# EAGLE board V4-AddOnZigbee-SMD-V006 (EAGLE 9.3.0)
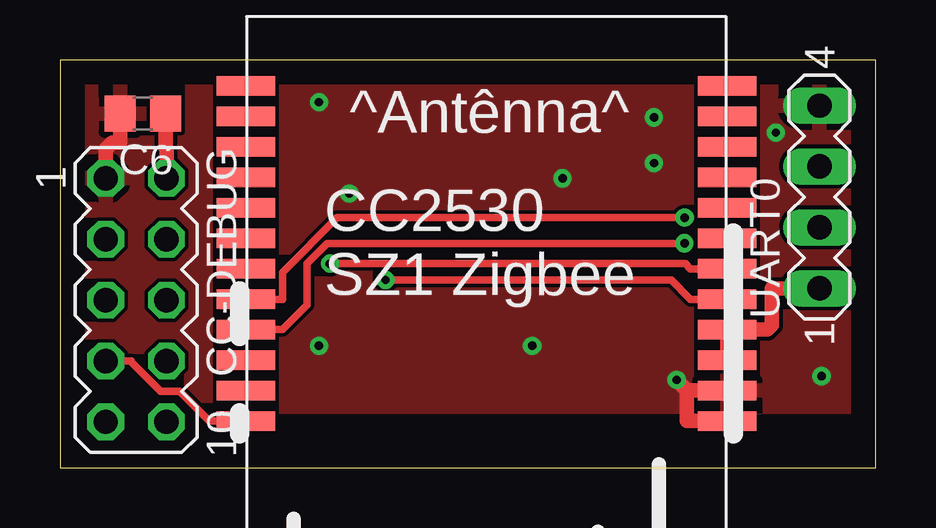
[diagram p0: board, top side]
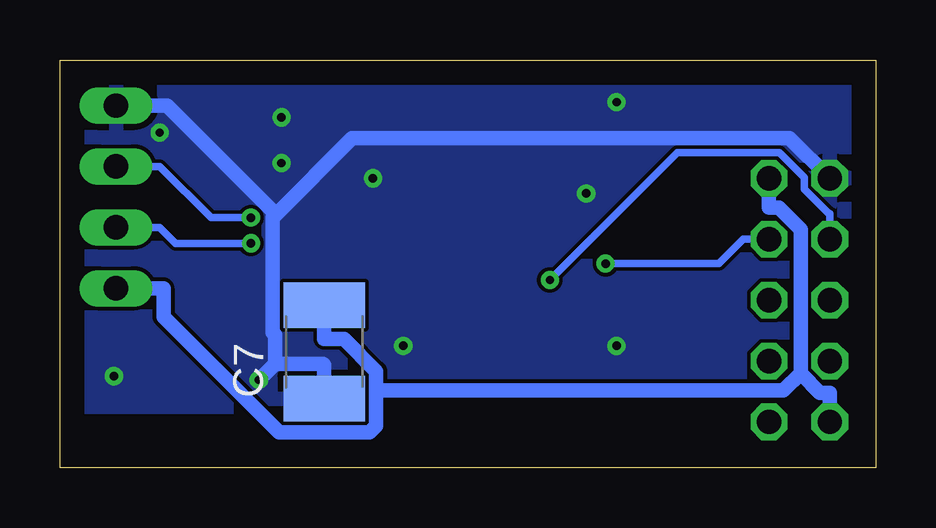
[diagram p1: board, bottom side, seen from below]

Size 34 x 17 mm. Coordinates in mm from the lower left corner, seen from the top.
Outline: 0,0 34,0 34,17 0,17 0,0
Copper layers (1*16): Top 0.035mm / dielectric 1.5mm / Bottom 0.035mm
Design rules "default": minimum track width 6mil, minimum drill 0.35mm, track to track 6mil, track to pad 6mil, pad to pad 6mil, via to via 6mil, smd to smd 6mil, copper to edge 40mil, drill to drill 6mil, minimum pad ring 10mil, minimum via ring 8mil, stop-mask expansion 4mil, vias tented up to drill 0mil, thermal gap 10mil
Net classes: 0 default: width 0.305 mm; 1 PWR: width 0.61 mm

## Footprints (pad centres in the part's own frame; a part is rotated, then mirrored left to right if it is on the bottom)
C0805 = smd 1.3 x 1.5: 1 -0.95,0; 2 0.95,0
C1812 = smd 1.9 x 3.4: 1 -1.95,0; 2 1.95,0
MA05-2 = drill 1.016 octagon: 1 -5.08,-1.27; 2 -5.08,1.27; 3 -2.54,-1.27; 4 -2.54,1.27; 5 0,-1.27; 6 0,1.27; 7 2.54,-1.27; 8 2.54,1.27; 9 5.08,-1.27; 10 5.08,1.27
SZ1ZIGBEE-SMD = smd 2.438 x 0.813: P$1 -10.036,-12.101; P$2 -10.036,-10.831; P$3 -10.036,-9.561; P$4 -10.036,-8.291; P$5 -10.036,-7.021; P$6 -10.036,-5.751; P$7 -10.036,-4.481; P$8 -10.036,-3.211; P$9 -10.036,-1.941; P$10 -10.036,-0.671; P$11 -10.036,0.599; P$12 -10.036,1.869; P$13 10.03,-12.101; P$14 10.03,-10.831; P$15 10.03,-9.561; P$16 10.03,-8.291; P$17 10.03,-7.021; P$18 10.03,-5.751; P$19 10.03,-4.481; P$20 10.03,-3.211; P$21 10.03,-1.941; P$22 10.03,-0.671; P$23 10.03,0.599; P$24 10.03,1.869
MA04-1 = drill 1.016 long: 1 -3.81,0; 2 -1.27,0; 3 1.27,0; 4 3.81,0

## Placement (x,y rotation side)
C6  22pF  [C0805]  3.46,14.76 180 top
C7  [C1812]  22.98,4.83 90 bottom
CC-DEBUG  [MA05-2]  3.17,6.99 270 top
U$1  CC2530  [SZ1ZIGBEE-SMD]  17.78,3.81 180 top
UART0  [MA04-1]  31.66,11.29 90 top

## Library data of the parts
C6 C7 = rcl; SPICEPREFIX: C
CC-DEBUG UART0 = con-lstb; OC_FARNELL: unknown; OC_NEWARK: unknown
U$1 = zigbee

## Nets
BT: U$1.P$6
CS: CC-DEBUG.5
DC: CC-DEBUG.3 U$1.P$8
DD: CC-DEBUG.4 U$1.P$7
GND [PWR]: C6.2 C7.1 CC-DEBUG.1 U$1.P$11 U$1.P$12 UART0.4
MISO: CC-DEBUG.10
MOSI: CC-DEBUG.8
RST: CC-DEBUG.7 U$1.P$24
RX0: U$1.P$20 UART0.3
SCLK: CC-DEBUG.6
TX0: U$1.P$21 UART0.2
VCC [PWR]: C6.1 C7.2 CC-DEBUG.2 CC-DEBUG.9 U$1.P$9 U$1.P$10 UART0.1

## Tracks (layer width: path | path; a pad name or v marks a point on that pad's centre or on a via)
DC  (via drill 0.35 pad 0.76)
  Top 0.305: v13.57,7.82 25.49,7.82 26.29,7.02 U$1.P$8
  Bottom 0.305: v13.57,7.82 8.26,13.13 4,13.13 2.97,12.1 2.97,11.62 1.95,10.59 1.91,10.59 CC-DEBUG.3
DD  (via drill 0.35 pad 0.76)
  Top 0.305: U$1.P$7 26.29,8.29 26.08,8.51 v11.25,8.51
  Bottom 0.305: CC-DEBUG.4 5.51,9.53 6.53,8.51 v11.25,8.51
GND  (via drill 0.35, 0.35 pad 0.76)
  Top 0.61: 26.14,3.21 26.14,3.22 v25.71,3.66 | 26.14,3.21 26.14,1.94 U$1.P$12 | U$1.P$11 26.14,3.21 | C6.2 2.51,13.55 2.17,13.55 1.91,13.28 CC-DEBUG.1
  Bottom 0.61: 25.04,4.32 25.04,5.53 25.14,5.63 25.14,10.42 25,10.56 | v25.71,3.66 25.04,4.32 | 25.04,4.32 23.02,4.32 22.98,4.28 C7.1 | CC-DEBUG.1 3.58,13.74 21.81,13.74 25,10.56 | 25,10.56 29.53,15.1 29.68,15.1 UART0.4
  other vias: 10.79,5.08 19.68,5.08 31.75,3.81 29.84,13.97 24.77,12.7 24.77,14.61 10.79,15.24 12.06,11.43 20.95,12.06
  pour Top: 0.64,15.88 33.02,15.88 33.02,2.54 0.64,2.54
  pour Bottom: 0.64,2.54 0.64,15.88 33.02,16.51 33.02,2.54
RST
  Top 0.305: CC-DEBUG.7 2.97,4.45 2.97,4.4 4.2,3.17 4.99,3.17 6.23,1.94 U$1.P$24
RX0  (via drill 0.35 pad 0.76)
  Top 0.305: v26.04,10.42 11.55,10.42 9.27,8.14 9.27,7.02 U$1.P$20
  Bottom 0.305: v26.04,10.42 27.7,10.42 29.84,12.55 UART0.3
TX0  (via drill 0.35 pad 0.76)
  Top 0.305: v26.03,9.35 11.13,9.35 10.3,8.52 10.3,6.77 9.27,5.75 U$1.P$21
  Bottom 0.305: v26.03,9.35 29.17,9.35 29.84,10.02 UART0.2
VCC
  Top 0.61: UART0.1 29.68,7.47 29.68,5.94 29.49,5.75 U$1.P$9 U$1.P$10 | CC-DEBUG.2 4.45,13.28 4.41,13.32 C6.1
  Bottom 0.61: UART0.1 29.68,7.47 29.68,6.28 24.87,1.47 21.09,1.47 20.82,1.74 20.82,3.22 | 20.82,3.22 20.82,4.02 22.17,5.37 22.98,5.37 C7.2 | 3.12,3.93 3.84,3.22 20.82,3.22 | 3.12,3.93 3.12,9.94 4.04,10.85 4.45,10.85 CC-DEBUG.2 | 3.12,3.93 2.31,3.12 1.91,3.12 CC-DEBUG.9

## Text on the board
tNames: ^Antênna^